# Altium PCB Power_SchematicWITHFOOTPRINTS.PcbDoc
Units mm, origin at the board's own origin, x right, y up, seen from the top; angles counter-clockwise.
Board outline 71.75 x 89.92 mm, 2 copper layers (Top Layer, Bottom Layer), stack 1.671 mm thick; 32 components, 19 nets, 90 pads, 9 vias.
Unrouted connection lines stored in the file: 6.
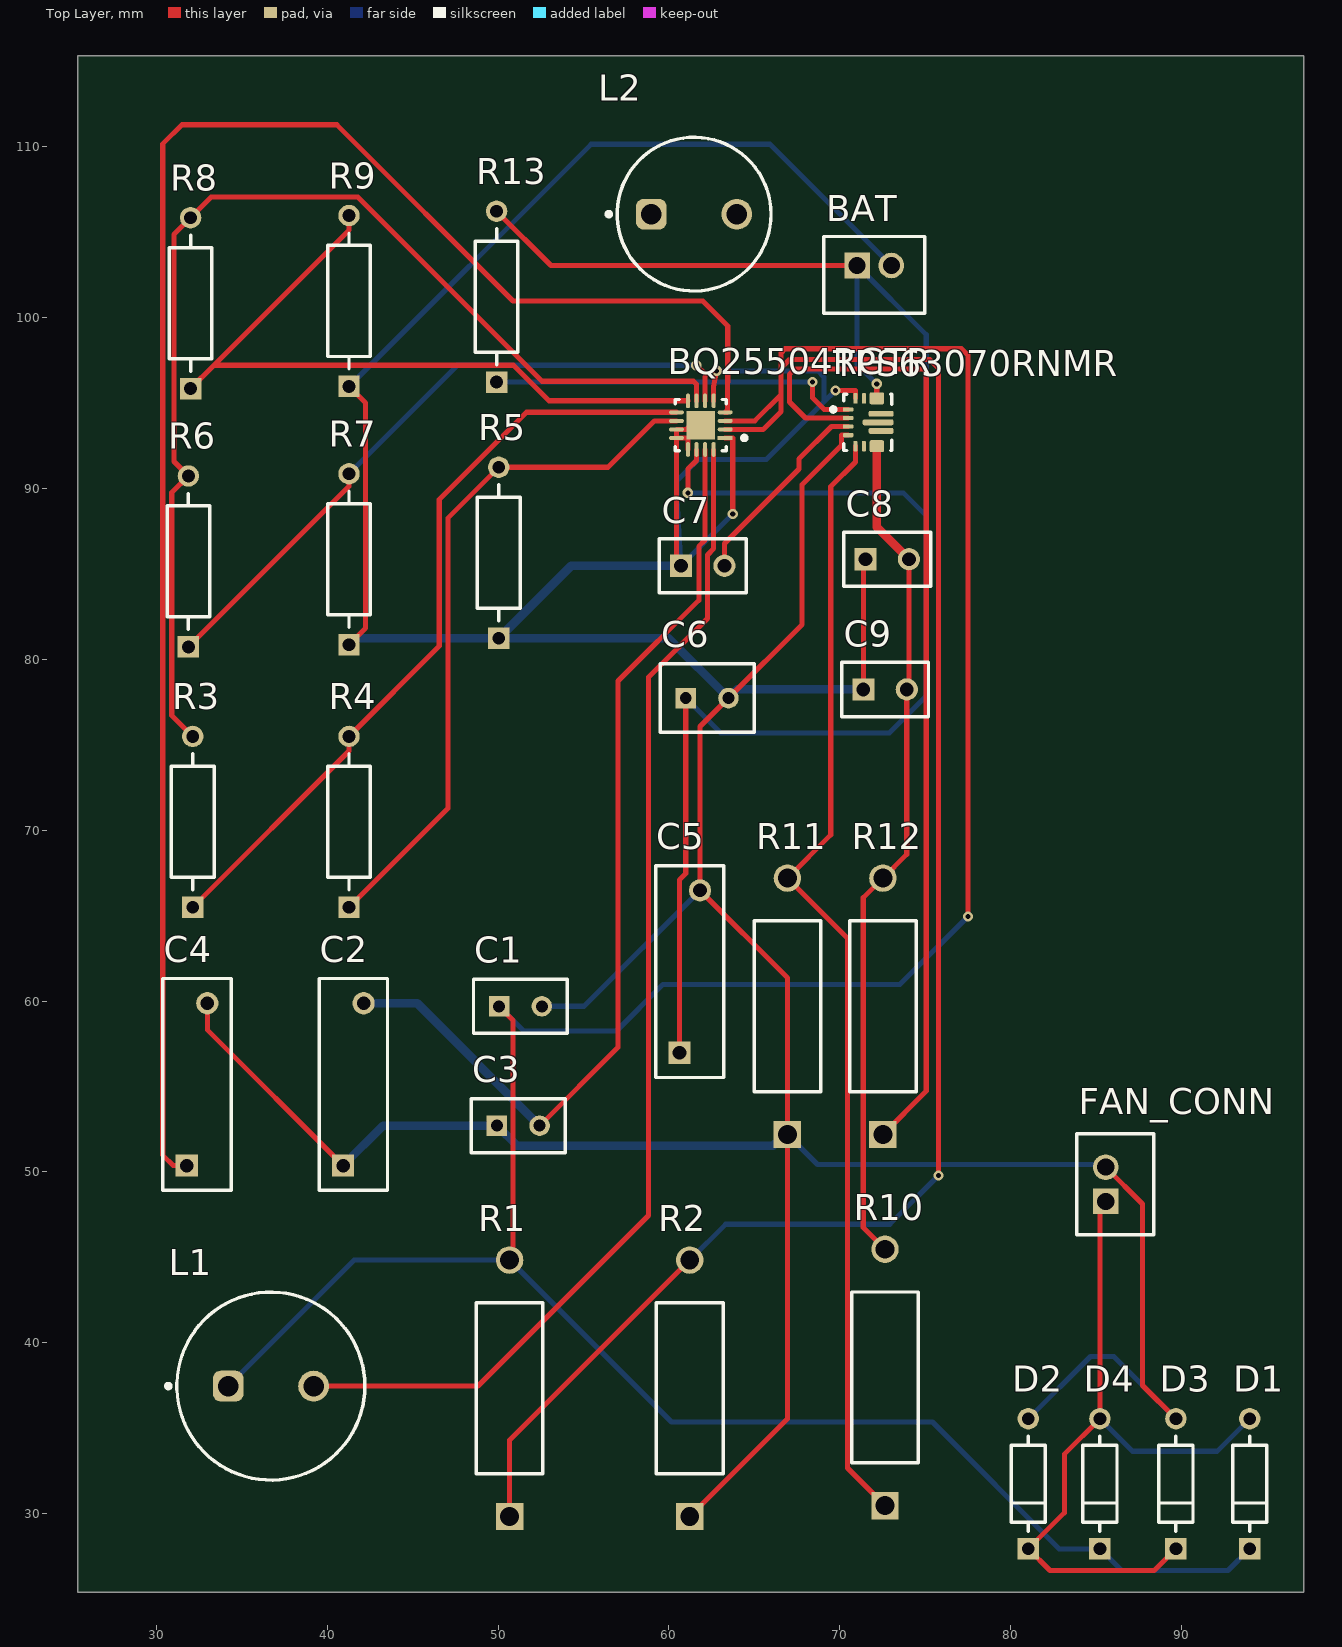
[diagram p0: Top Layer view]
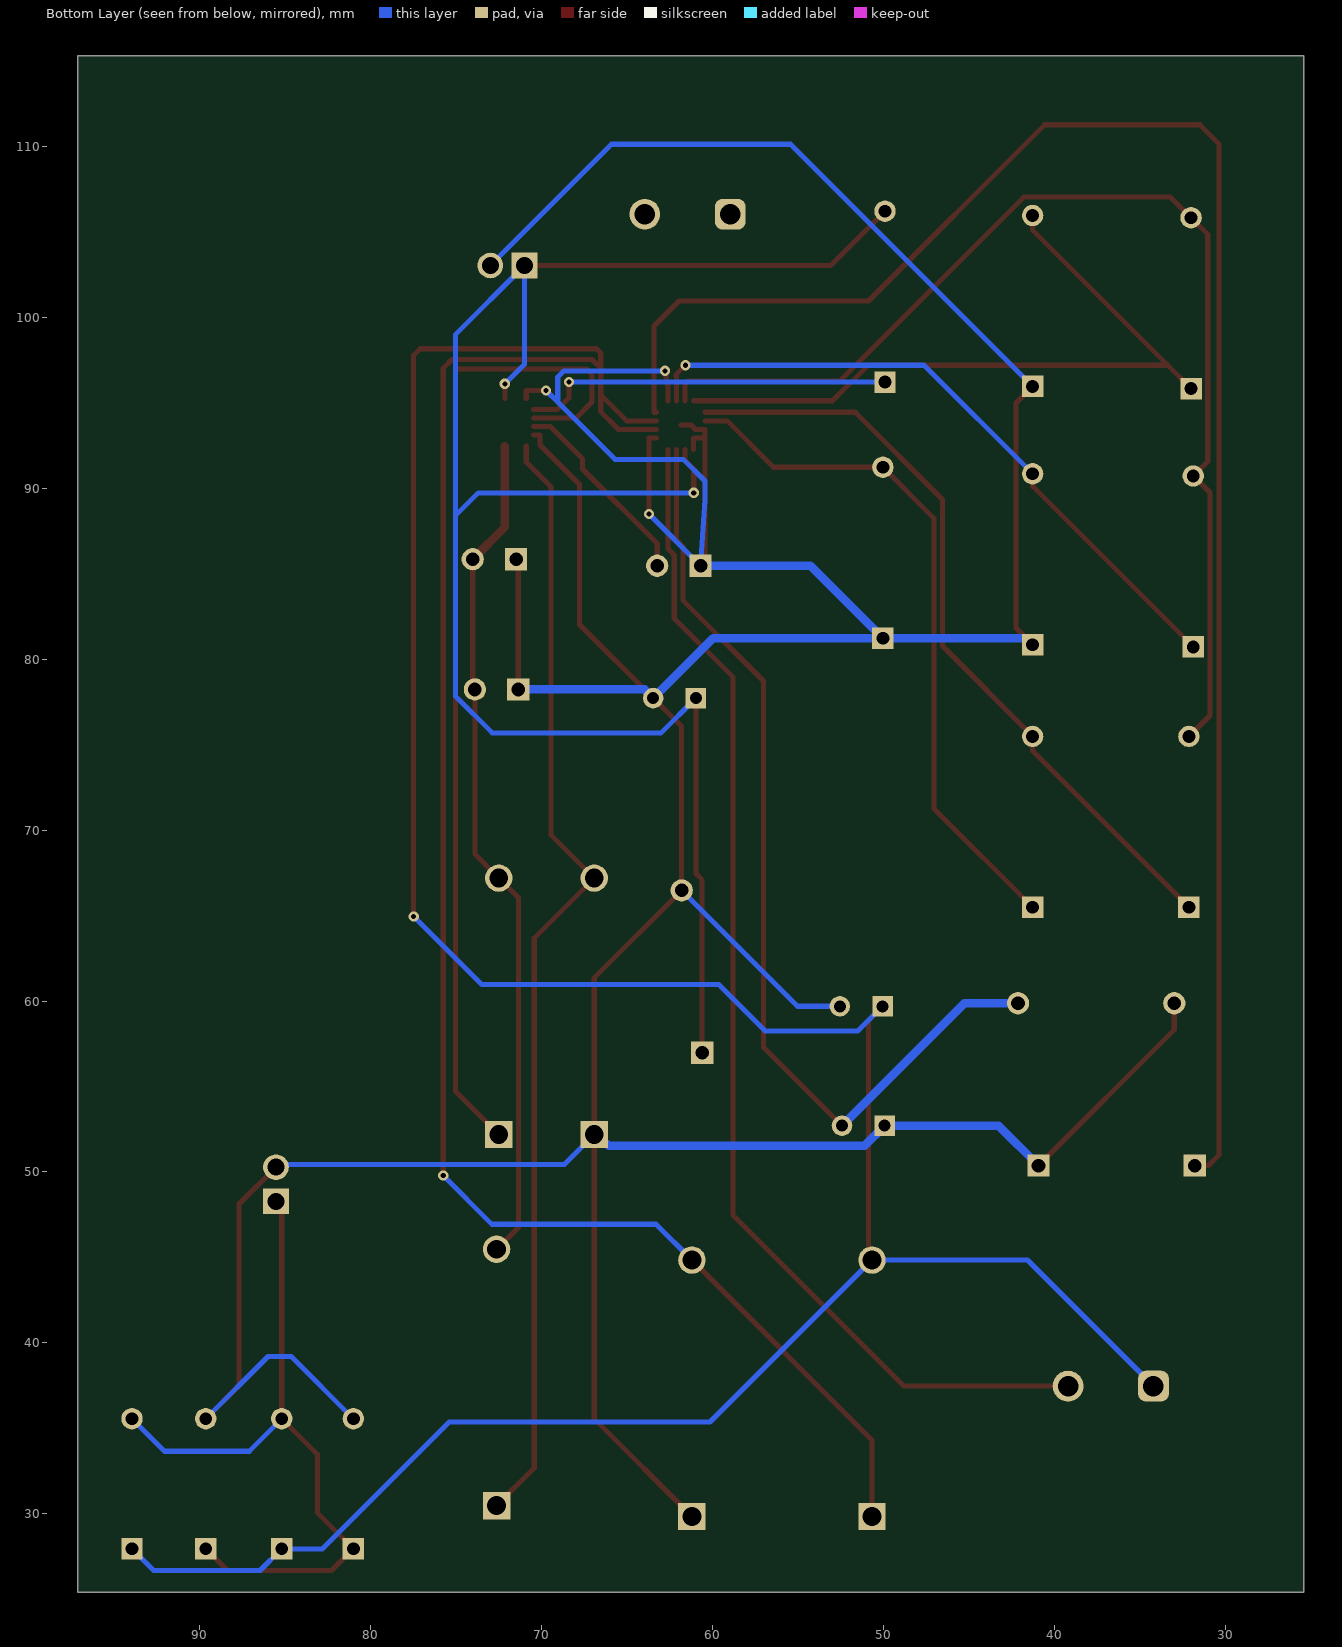
[diagram p1: Bottom Layer view, seen from below]
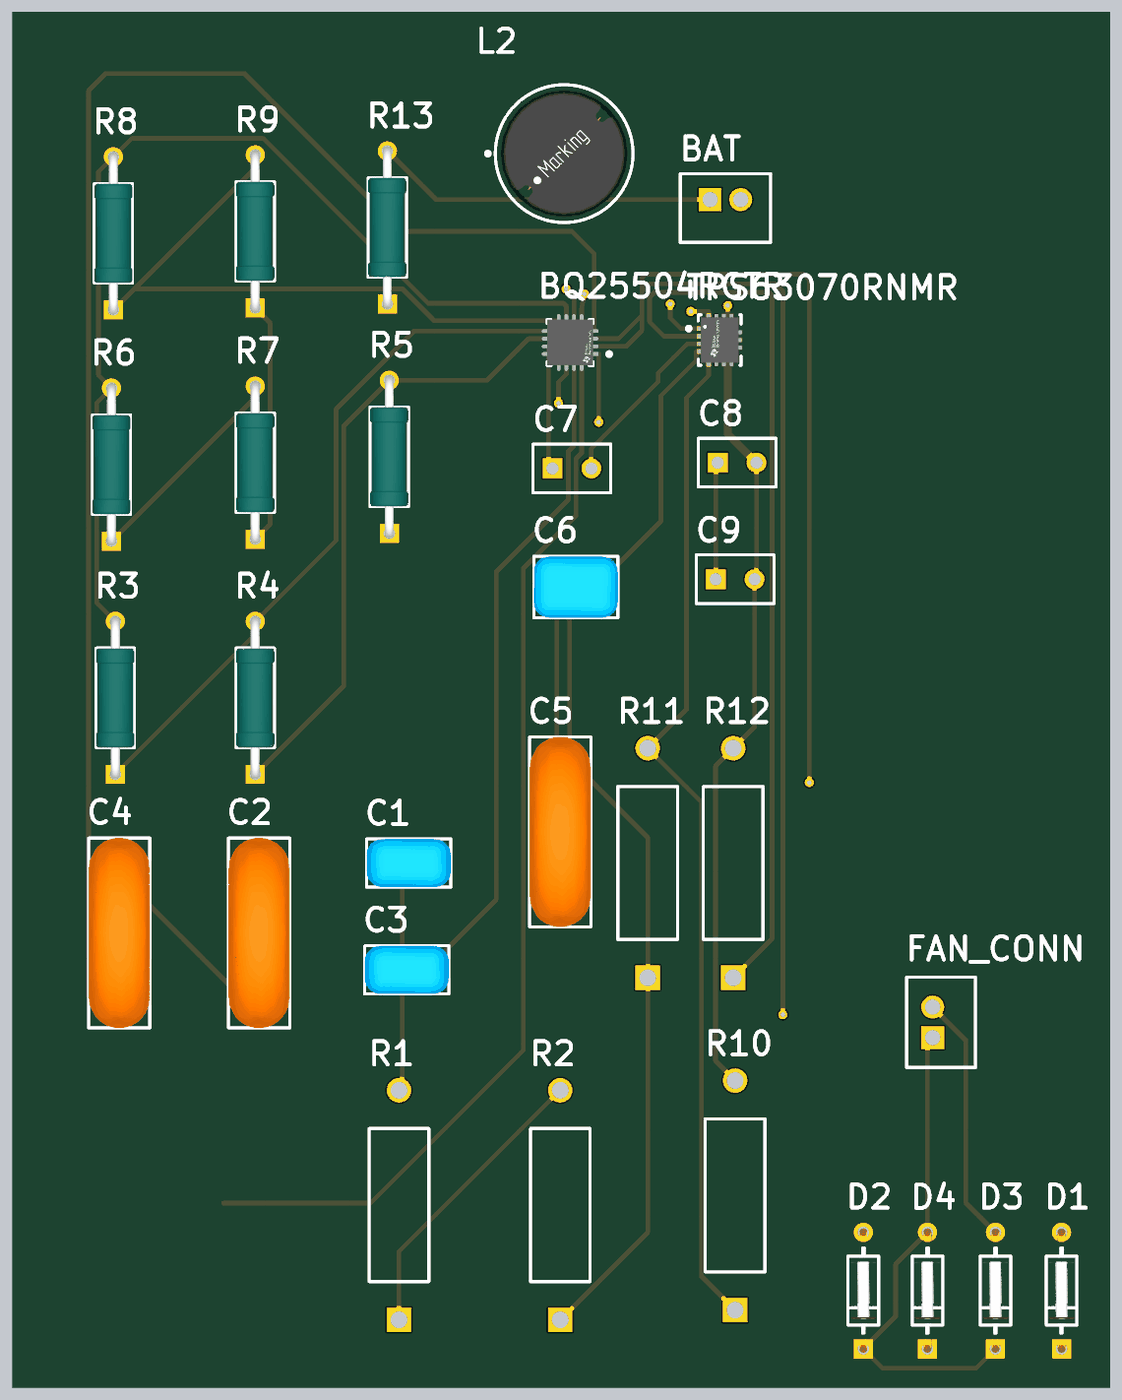
[diagram p2: 3D render of the assembled board from above, using the file's embedded part models]

## Layer stack, top to bottom
Top Solder: solder mask 0.0102, Solder Resist, Dk 3.5
Top Layer: signal copper 0.0356
Dielectric 1: dielectric 1.6, FR-4, Dk 4.8
Bottom Layer: signal copper 0.0356
Bottom Solder: solder mask 0.0102, Solder Resist, Dk 3.5

## Board outline
25.4,25.4 97.155,25.4 97.155,115.316 25.4,115.316

## Design rules (kind name [scope] priority, off if disabled: settings)
Clearance [All] p1: gap=0.2 ignorepadtopadclearanceinfootprint=FALSE
PolygonConnect [All] p1: connectstyle=Relief reliefconductorwidth=0.254 reliefentries=4 polygonreliefangle="90 Angle" airgapwidth=0.254
RoutingVias [All] p1: holewidth=0.3 width=0.6 viastyle="Through Hole" minholewidth=0.3 minwidth=0.6 maxholewidth=0.3 maxwidth=0.6
ShortCircuit ShortCircuit_1 [All] p1: allowed=FALSE
ShortCircuit [All] p2: allowed=FALSE
SilkToSolderMaskClearance [IsPad] p1: minsilkscreentomaskgap=0.1 clearancetoexposedcopper=TRUE
SolderMaskExpansion [All] p1: expansion=0.102 istentingtop=FALSE
UnRoutedNet [All] p1: checkbadconnections=TRUE
Width [All] p1: maxlimit=1 minlimit=0.3 preferedwidth=0.3
27 further rules are at their usual default settings.

## Components (designator, comment, footprint, x,y, rotation, side; value= is the part's Value field where it differs from the comment)
BAT "B2B-PH-K-S(LF)(SN)" JST-B2B-PH-K-S_V 72.009,102.489 r0 top
BQ25504RGTR "BQ25504RGTR" FP-RGT0016C-IPC_B 61.861,93.7 r180 top
C1 "RCER71E475K2DBH03A" FP-RCE2A2-MFG 51.308,59.69 r0 top
C2 "562R5GAS10" FP-562R5GAS10-MFG 41.529,55.118 r90 top
C3 "RCER71E475K2DBH03A" FP-RCE2A2-MFG 51.181,52.705 r0 top
C4 "562R5GAS10" FP-562R5GAS10-MFG 32.385,55.118 r90 top
C5 "562R5GAS10" FP-562R5GAS10-MFG 61.214,61.722 r90 top
C6 "RCER71E106K3DBH03A" FP-RCE3DB-MFG 62.23,77.724 r0 top
C7 "C320C104K5R5TA" CAPR51-254-508X318X736 61.976,85.471 r0 top
C8 "C320C104K5R5TA" CAPR51-254-508X318X736 72.771,85.852 r0 top
C9 "C320C104K5R5TA" CAPR51-254-508X318X736 72.644,78.232 r0 top
D1 "1N5711" FP-DO-35-MFG 93.98,31.75 r90 top value=2pF
D2 "1N5711" FP-DO-35-MFG 81.026,31.75 r90 top value=2pF
D3 "1N5711" FP-DO-35-MFG 89.662,31.75 r90 top value=2pF
D4 "1N5711" FP-DO-35-MFG 85.217,31.75 r90 top value=2pF
FAN_CONN "B2B-PH-K-S(LF)(SN)" JST-B2B-PH-K-S_V 86.106,49.276 r90 top
L1 "7447471033" WE-TIS_1111 1306.703,1307.465 r0 top
L2 "744741221" WE-TI_8055 61.468,106.045 r0 top
R1 "PR02000206202JA100" VISH-A1-2_V2 50.673,37.338 r90 top
R2 "PR02000206202JA100" VISH-A1-2_V2 61.214,37.338 r90 top
R3 "MRS25000C1000FRP00" FP-MRS25-MFG 32.131,70.485 r90 top
R4 "MRS25000C1000FRP00" FP-MRS25-MFG 41.275,70.485 r90 top
R5 "MRS25000C1000FRP00" FP-MRS25-MFG 50.038,86.233 r90 top
R6 "MRS25000C1000FRP00" FP-MRS25-MFG 31.877,85.725 r90 top
R7 "MRS25000C1000FRP00" FP-MRS25-MFG 41.275,85.852 r90 top
R8 "MRS25000C1000FRP00" FP-MRS25-MFG 32.004,100.838 r90 top
R9 "MRS25000C1000FRP00" FP-MRS25-MFG 41.275,100.965 r90 top
R10 "PR02000206202JA100" VISH-A1-2_V2 72.644,37.973 r90 top
R11 "PR02000206202JA100" VISH-A1-2_V2 66.929,59.69 r90 top
R12 "PR02000206202JA100" VISH-A1-2_V2 72.517,59.69 r90 top
R13 "MRS25000C1002FCT00" FP-MRS25-MFG 49.911,101.219 r90 top
TPS63070RNMR "TPS63070RNMR" FP-RNM0015A-MFG 71.635,93.865 r0 top

## Footprints (in the part's own frame and the unit in brackets; to place one, negate y for a bottom-side part, rotate by r counter-clockwise, add the part's x,y. Pads: shape width x height; smd on the part's side, far side on the other; paste and mask are expansions set on the pad)
CAPR51-254-508X318X736 [mm] "THD, 2-Leads, Body 5.08x3.18mm"
  rect 1.3x1.3 hole 0.8: 1(-1.27,0)
  round 1.3 hole 0.8: 2(1.27,0)
  silkscreen extent -2.54,-1.59 2.54,1.59, body extent -2.54,-1.59 2.54,1.59, height 7.36
FP-562R5GAS10-MFG [mm]
  rect 1.3x1.3 hole 0.8 paste-2539.97 mask+0: 1(-4.75,0.6)
  round 1.3 hole 0.8 paste-2539.97 mask+0: 2(4.75,-0.6)
  silkscreen extent -6.2,-2 6.2,2, body extent -6.3,-2.1 6.3,2.1, height 0.25
FP-DO-35-MFG [mm]
  rect 1.25x1.25 hole 0.75 paste-2539.97 mask+0: 1(-3.808,0)
  round 1.25 hole 0.75 paste-2539.97 mask+0: 2(3.808,0)
  silkscreen extent -2.78,-1 2.78,1, body extent -4.53,-1.1 4.53,1.1, height 0.25
FP-MRS25-MFG [mm]
  rect 1.25x1.25 hole 0.75 paste-2539.97 mask+0: 1(-5,0)
  round 1.25 hole 0.75 paste-2539.97 mask+0: 2(5,0)
  silkscreen extent -3.97,-1.25 3.97,1.25, body extent -5.72,-1.35 5.72,1.35, height 0.25
FP-RCE2A2-MFG [mm]
  rect 1.2x1.2 hole 0.7 paste-2539.97 mask+0: 1(-1.25,0)
  round 1.2 hole 0.7 paste-2539.97 mask+0: 2(1.25,0)
  silkscreen extent -2.75,-1.58 2.75,1.58, body extent -2.85,-1.68 2.85,1.68, height 0.25
FP-RCE3DB-MFG [mm]
  rect 1.2x1.2 hole 0.7 paste-2539.97 mask+0: 1(-1.25,0)
  round 1.2 hole 0.7 paste-2539.97 mask+0: 2(1.25,0)
  silkscreen extent -2.75,-2 2.75,2, body extent -2.85,-2.1 2.85,2.1, height 0.25
FP-RGT0016C-IPC_B [mm]
  rect 0.866x0.239 smd paste+0 mask+0: 1(-1.423,0.75)
  rrect100% 0.866x0.239 smd paste+0 mask+0: 2(-1.423,0.25) 3(-1.423,-0.25) 4(-1.423,-0.75) 9(1.423,-0.75) 10(1.423,-0.25) 11(1.423,0.25) 12(1.423,0.75)
  rrect100% 0.239x0.866 smd paste+0 mask+0: 5(-0.75,-1.423) 6(-0.25,-1.423) 7(0.25,-1.423) 8(0.75,-1.423) 13(0.75,1.423) 14(0.25,1.423) 15(-0.25,1.423) 16(-0.75,1.423)
  rect 1.68x1.68 smd paste-1000 mask+0: 17(0,0)
  silkscreen extent -2.68,-1.5 1.5,1.5, body extent -2.11,-2.11 2.11,2.11, height 0.25
FP-RNM0015A-MFG [mm]
  rrect40% 0.6x0.25 smd paste+0 mask-1000: 1(-1.15,0.75) 2(-1.15,0.25) 3(-1.15,-0.25) 4(-1.15,-0.75)
  rrect40% 0.25x0.6 smd paste+0 mask-1000: 5(-0.725,-1.4) 6(-0.225,-1.4) 14(-0.225,1.4) 15(-0.725,1.4)
  rrect29% 0.85x0.7 smd paste-1000 mask-1000: 7-8(0.525,-1.4) 12-13(0.525,1.4)
  rrect57% 1.45x0.35 smd paste-1000 mask-1000: 9(0.775,-0.5) 11(0.775,0.5)
  rrect57% 1.8x0.35 smd paste-1000 mask-1000: 10(0.6,0)
  silkscreen extent -2.15,-1.65 1.4,1.65, body extent -1.55,-1.85 1.6,1.85, height 0.25
JST-B2B-PH-K-S_V [mm] "Connector, 2-Leads, Body 5.9x4.5mm, Pitch 2mm"
  rect 1.5x1.5 hole 1: 1(-1,0.55)
  round 1.5 hole 1: 2(1,0.55)
  silkscreen extent -2.95,-2.25 2.95,2.25, body extent -2.95,-2.25 2.95,2.25, height 6
VISH-A1-2_V2 [mm] "Through Hole, 2-Leads, Dia 3.9mm, Body Length 10mm, Pin Spacing 15mm"
  rect 1.6x1.6 hole 1.1: 1(-7.5,0)
  round 1.6 hole 1.1: 2(7.5,0)
  silkscreen extent -5,-1.95 5,1.95, body extent -7.91,-1.95 7.92,1.95, height 3.88
WE-TI_8055 [mm] "Radial Leaded Wire Wound Inductor, body diameter 8.5mm"
  rrect50% 1.8x1.8 hole 1.2: 1(-2.5,0)
  round 1.8 hole 1.2: 2(2.5,0)
  silkscreen extent -5.11,-4.5 4.5,4.5, body extent -5.87,-5.87 5.87,5.87, height 5.55
WE-TIS_1111 [mm] "THT Shielded Radial Leaded Wire Wound Inductor, body diameter 11mm"
  rrect50% 1.8x1.8 hole 1.2: 1(-1272.5,-1270)
  round 1.8 hole 1.2: 2(-1267.5,-1270)
  silkscreen extent -1276.12,-1275.5 -1264.5,-1264.5, body extent -1275.3,-1275.3 -1264.7,-1264.7, height 10.6

## Part data
BAT FAN_CONN: library part CMP-2000-05162-1, "Male Header, Pitch 2 mm, 1 x 2 Position, Height 6 mm, Tail Length 3.4 mm, -25 to 85 degC, RoHS, Bulk", Manufacturer=JST, Datasheet URL=http://datasheet.octopart.com/B2B-PH-K-S%28LF%29%28SN%29-JST-datasheet-8324864.pdf, Datasheet Version=Nov-08, Manufacturer URL=http://www.jst.com/home2.html, No of Positions=2, Pitch=2mm, Style/Orientation=StraightHeader/Plug, Termination=Crimp, Type=ShroudedHeader
BQ25504RGTR: library part CMP-0321-00248-3, "IC ENERGY HARV CTRLR BATT 16QFN", Case/Package=QFN, Max Operating Temperature=85°C, Max Supply Voltage=5.25V, Min Input Voltage=130mV, Min Operating Temperature=-40°C, Min Supply Voltage=2.5V, Operating Supply Current=330nA, Operating Supply Voltage=3V, Output Current=200mA, Package Quantity=3000, Switching Frequency=1MHz, Contact Plating=Gold, Height=0.9mm, Lead Free="Lead Free", Length=3mm, Number of Pins=16, Packaging="Tape and Reel", Radiation Hardening=No, REACH SVHC="No SVHC", RoHS Compliant=Yes, Series=BQ25504
C1 C3: library part CMP-06035-022497-1, "Cap Ceramic 4.7uF 25V X7R ±10% Radial 2.5mm +125°C Automotive Ammo Pack", Capacitance=4.7uF, Case/Package=Radial, Dielectric=X7R, Max Operating Temperature=125°C, Min Operating Temperature=-55°C, Package Quantity=2000, Ratings=AEC-Q200, Resistor Type=Ceramic, Tolerance=10%, Voltage Rating=25V, Height=4mm, Height - Seated (Max)=0.157inch, Lead Diameter=0.5mm, Lead Pitch=0.098inch, Lead/Base Style=Straight, Length=0.217inch, Mount="Through Hole", Packaging="Tape and Reel", Termination=Radial, Voltage Rating (DC)=25V, Width=0.124inch
C2 C4 C5: library part CMP-02417-000061-1, "CAP CER 10000PF 1KV Z5U RADIAL", Capacitance=10nF, Case/Package=Radial, Dielectric=Z5U, Max Operating Temperature=105°C, Min Operating Temperature=-55°C, Package Quantity=250, Resistor Type=Ceramic, Tolerance=20%, Voltage=1kV, Application(s)="GENERAL PURPOSE", Construction=RADIAL, Contact Plating=Tin, Depth=4mm, Diameter=12.4mm, Dissipation Factor=2.5%, Height=0.25inch, Height - Seated (Max)=0.613inch, Lead Diameter=0.64mm, Lead Free="Lead Free", Lead Length=29mm, Lead Pitch=9.5mm, Lead/Base Style=Straight, Length=2inch, Mount="Through Hole", Packaging=Bulk, Radiation Hardening=No, RoHS Compliant=Yes, Series="Cera-Mite 562R", Termination=Radial, Voltage Rating=1kV, Voltage Rating (DC)=1kV, Weight=0.01lb, Width=4mm
C6: library part CMP-06035-005830-1, "Cap Ceramic 10uF 25V X7R ±10% Radial 2.5mm +125°C Automotive Ammo Pack", Capacitance=10uF, Case/Package=Radial, Dielectric=X7R, Max Operating Temperature=125°C, Min Operating Temperature=-55°C, Package Quantity=1500, Ratings=AEC-Q200, Resistor Type=Ceramic, Tolerance=10%, Voltage Rating=25V, Height=5mm, Height - Seated (Max)=0.197inch, Lead Diameter=0.5mm, Lead Pitch=0.098inch, Lead/Base Style=Straight, Length=0.217inch, Mount="Through Hole", Packaging="Tape and Reel", Termination=Radial, Voltage Rating (DC)=25V, Width=0.157inch
C7 C8 C9: library part CMP-1664-00004-1, "Radial Leaded Multilayer Ceramic Capacitor, 0.1 uF, +/- 10%, 50 V, -55 to 125 degC, 2-Pin THD, RoHS, Tape and Reel", Case\Package=SOT-23-5, Dropout Voltage="260 mV", Max Input Voltage="8 V", Max Operating Temperature="85 degC", Max Power Dissipation="250 mW", Min Operating Temperature="-40 degC", Output Current="150 mA", Output Voltage="5 V", Package Quantity=3000, ComponentLink1Description="Manufacturer URL", ComponentLink1URL=http://www.kemet.com/, ComponentLink2Description=Datasheet, ComponentLink2URL=http://www.kemet.com/docfinder?Partnumber=C320C104K5R5TA, DatasheetVersion=Dec-15, Height="1.3 mm", Length="3 mm", Mount="Surface Mount", Outputs=1, PackageDescription="2-Pin Through Hole Device, Body 5.08 x 3.18 mm, Pitch 2.54 mm", PackageReference=CAPR51-254-508X318X736, Packaging="Tape and Reel", Pins=5, Radiation Hardening=No, RoHSCompliant=true, Width="1.8 mm"
D1 D2 D3 D4: library part CMP-2000-05519-2, "RF DIODE SCHOTTKY 70V 430MW DO35", Capacitance=2pF, Forward Current=15mA, Manufacturer=STMicroelectronics, Max Junction Temp=+200°C, Max Repetitive Reverse Voltage=70V, Package=DO-35, Temperature="-65°C to +200°C", Temperature Range Low=-65°C, Automotive=No, Category=Diode, ComponentLink2Description=Datasheet, ComponentLink2URL=https://www.st.com/resource/en/datasheet/1n5711.pdf, Device Class L1="Discrete Semiconductors", Device Class L2=Diodes, Device Class L3="Schottky Diodes", Digikey Description="RF DIODE SCHOTTKY 70V 430MW DO35", Height=2mm, Ipc Land Pattern Name=DIOPA762W75L450D200, Lead Free=Yes, Manufacturer Part Number=1N5711, Mouser Description="Schottky Diodes & Rectifiers 15mA 70 Volt", Octopart=https://octopart.com/1n5711-stmicroelectronics-55399277, Reverse Voltage=70V, RoHS=TRUE, Temperature Range High=+200°C
L1: library part CMP-1406-00025-2, Ambient Temperature Range High=85°C, Ambient Temperature Range Low=-40°C, Case/Package=Radial, Current Rating=7.5A, DC Resistance (DCR)=9mΩ, Frequency=58MHz, Inductance=3.3µH, Inductance Tolerance=20%, Max Operating Temperature=125°C, Saturation Current=8A, Test Frequency=1kHz, Composition=Wirewound, Core Material=Ferrite, Diameter=11mm, Features=Shielded, Height=11.5mm, Lead Diameter=650µm, Lead Pitch=5mm, Length=11mm, Max DC Current=7.5A, Min Operating Temperature=-40°C, Mount="Radial, Through Hole", NexarPartId=22866550, Number of Pins=2, REACH SVHC=Unknown, RMS Current (Irms)=7.5A, RoHS=Compliant, Self Resonant Frequency=58MHz, Series Resistance=9mΩ, Shielding=Shielded, Termination=Radial, Tolerance=20%, Width=11mm
L2: library part CMP-0225-00032-3, Ambient Temperature Range High=85°C, Ambient Temperature Range Low=-40°C, Current Rating=660mA, DC Resistance (DCR)=970mΩ, Inductance=220µH, Inductance Tolerance=10%, Max Operating Temperature=125°C, Self Resonant Frequency=5MHz, Height=5.5mm, Length=8.5mm, Min Operating Temperature=-40°C, NexarPartId=22803387, Number of Pins=2, RoHS=Compliant, Width=8.5mm
R1 R2 R10 R11 R12: library part CMP-1240-00001-1, "Power Metal Film Leaded Resistor, 62 KOhm +/-5%, 2 W, 2-Pin THD, RoHS, Ammo Pack", Manufacturer="Vishay Semiconductor", Power="2 W", Resistance="62 KOhm", Temperature Coefficient="+/-250 ppm/degC", Tolerance=+/-5%, ComponentLink1Description="Manufacturer URL", ComponentLink1URL=http://www.vishay.com/, ComponentLink2Description=Datasheet, ComponentLink2URL=http://www.vishay.com/docs/28729/28729.pdf, ComponentLink3Description="Package Specification", ComponentLink3URL=http://www.vishay.com/docs/28729/28729.pdf, DatasheetVersion=Jun-13, Mounting Technology="Through Hole", PackageDescription="2-Pin Axial Lead, Body 10 x 3.9 mm", Packing="Ammo Pack", PartNumber=PR02000206202JA100, RoHS=TRUE
R3 R4 R5 R6 R7 R8 R9: library part CMP-00030-42757237-1, "MRS25000C1000FRP00 Resistor, 100 Ohm, ± 1%, 600 mW, Axial Leaded, Metal Film (Thin Film), Professional", Case/Package=Axial, Max Operating Temperature=155°C, Max Power Dissipation=600mW, Min Operating Temperature=-55°C, Resistance=100Ω, Temperature Coefficient=50ppm/°C, Tolerance=1%, Voltage Rating=350V, Composition="Metal Film, Thin Film", Contact Plating=Tin, Diameter=2.5mm, Lead Diameter=600µm, Lead Free="Lead Free", Length=6.5mm, Military Standard=Not, Mount="Through Hole", NexarPartId=42757237, Number of Pins=2, Number of Terminations=2, Packaging="Tape & Reel (TR)", Power Rating=600mW, Radiation Hardening=No, REACH SVHC=Unknown, RoHS=Compliant, Schedule B="8533210090, 8533210090", Termination=Axial, Voltage Rating (DC)=350V, Width=2.5mm
R13: library part CMP-00030-42632392-1, "MRS25000C1002FCT00 Resistor, 10 kOhm, ± 1%, 600 mW, Axial Leaded, Metal Film (Thin Film), Professional", Case/Package=Conformal, Max Operating Temperature=155°C, Max Power Dissipation=600mW, Min Operating Temperature=-55°C, Resistance=10kΩ, Temperature Coefficient=50ppm/°C, Tolerance=1%, Voltage Rating=350V, Composition="Metal Film, Thin Film", Contact Plating=Tin, Diameter=2.5mm, Lead Free="Lead Free", Lead Length=26mm, Length=6.5mm, Military Standard=Not, Mount="Through Hole", NexarPartId=42632392, Number of Pins=2, Number of Terminations=2, Power Rating=600mW, Radiation Hardening=No, REACH SVHC=Unknown, RoHS=Compliant, Schedule B="8533210090, 8533210090", Termination=Axial, Voltage Rating (DC)=350V, Width=2.5mm
TPS63070RNMR: library part CMP-04918-000409-1, "IC REG BCK BST ADJ 3.6A 15VQFN", Case/Package=VQFN, Max Input Voltage=16V, Max Operating Temperature=125°C, Max Output Voltage=9V, Min Input Voltage=2V, Min Operating Temperature=-40°C, Min Output Voltage=2.5V, Output Current=2A, Quiescent Current=50uA, Switching Frequency=2.4MHz, Lead Free="Lead Free", Mount="Surface Mount", Number of Outputs=1, Number of Pins=15, Output Configuration=Positive, Output Type=Adjustable, Packaging="Tape and Reel", RoHS Compliant=Yes, Synchronous Rectifier=Yes, Topology=Buck-Boost

## Via types
v1: diameter 0.6, hole 0.3, Top Layer to Bottom Layer, 9 vias

## Nets (pads, with @x,y where several pads share a name; then routed paths per layer and width w, separated by ;. In a path a pad name is that pad's centre, name@x,y a point inside that pad or via, vN(x,y) a via of type N, cw(c..) or ccw(c..) an arc to the next point about the centre after c; other vN are vias at no path point)
ESP: C8.2 C9.2 R10.2 R12.2 TPS63070RNMR.7-8 | length 49.4
  Top Layer w0.3: R10.2 71.367,46.75 71.367,66.04 R12.2 73.914,68.587 C9.2 74.041,78.359 C8.2
  Top Layer w0.5: TPS63070RNMR.7-8 72.16,87.733 C8.2
FAN_VIN: D1.2 D2.1 D3.1 D4.2 FAN_CONN.1 | length 42.2
  Top Layer w0.3: FAN_CONN.1 85.217,47.937 D4.2 83.134,33.475 83.134,30.05 D2.1 82.298,26.67 88.39,26.67 D3.1
  Bottom Layer w0.3: D4.2 87.12,33.655 92.077,33.655 D1.2
GND: BAT.2 BQ25504RGTR.1 BQ25504RGTR.5 BQ25504RGTR.11 BQ25504RGTR.12 BQ25504RGTR.13 BQ25504RGTR.17 C1.2 C2.1 C3.1 C4.2 C5.2 C6.2 C7.1 C8.1 C9.1 D2.2 D3.2 FAN_CONN.2 R2.1 R5.1 R7.1 R9.1 R11.1 TPS63070RNMR.4 TPS63070RNMR.6 TPS63070RNMR.10 TPS63070RNMR.15 | length 328
  Top Layer w0.3: C4.2 32.985,58.312 C2.1 ; R7.1 42.25,81.827 42.25,94.99 R9.1 ; C7.1 60.438,85.739 BQ25504RGTR.12 ; BQ25504RGTR.13 61.111,92.95 BQ25504RGTR.12 ; R2.1 66.929,35.553 R11.1 66.929,61.357 C5.2 61.814,76.058 C6.2 67.793,82.037 67.793,90.221 70.104,92.532 70.104,93.115 TPS63070RNMR.4 ; BQ25504RGTR.17 61.261,93.7 61.011,93.45 BQ25504RGTR.11 BQ25504RGTR.12 ; BQ25504RGTR.5 62.611,95.936 v1(62.789,96.876) ; BQ25504RGTR.1 63.729,92.95 v1(63.729,88.494) ; v1(69.748,95.733) 70.91,95.733 TPS63070RNMR.15 ; C9.1 71.374,85.725 C8.1 ; FAN_CONN.2 87.713,48.119 87.713,37.507 D3.2
  Bottom Layer w0.3: R9.1 55.444,110.134 65.914,110.134 BAT.2 ; C1.2 55.032,59.69 C5.2 ; v1(62.789,96.876) 68.707,96.876 69.063,96.52 69.063,95.047 ; v1(63.729,88.494) C7.1 60.453,89.341 60.453,90.424 61.725,91.696 65.712,91.696 69.063,95.047 ; R11.1 68.685,50.434 85.398,50.434 FAN_CONN.2 ; v1(69.748,95.733) 69.063,95.047 ; D2.2 84.66,39.192 86.028,39.192 D3.2
  Bottom Layer w0.5: C2.1 43.266,52.705 C3.1 51.099,51.537 66.086,51.537 66.19,51.64 66.379,51.64 R11.1 ; R7.1 41.65,81.227 41.937,81.227 41.943,81.233 R5.1 ; C7.1 54.276,85.471 R5.1 ; C9.1 63.988,78.232 C6.2 59.971,81.233 R5.1
NetBQ25504RGTR_2: BQ25504RGTR.2 C1.1 D1.1 D4.1 L1.1 R1.2 | length 168.2
  Top Layer w0.3: C1.1 50.881,58.867 50.881,45.046 R1.2 ; BQ25504RGTR.2 65.51,93.45 66.548,94.488 66.548,97.917 66.802,98.171 77.114,98.171 77.495,97.79 v1(77.495,64.948)
  Bottom Layer w0.3: L1.1 41.576,44.838 R1.2 60.154,35.357 75.413,35.357 82.827,27.942 D4.1 86.489,26.67 92.708,26.67 D1.1 ; C1.1 51.506,58.242 56.921,58.242 59.639,60.96 73.508,60.96 v1(77.495,64.948)
NetBQ25504RGTR_3: BQ25504RGTR.3 R1.1 R2.2 | length 98.3
  Top Layer w0.3: R1.1 50.673,34.297 R2.2 ; BQ25504RGTR.3 65.024,93.95 66.548,95.474 66.548,97.028 67.056,97.536 75.26,97.536 75.768,97.028 v1(75.768,49.784)
  Bottom Layer w0.3: R2.2 63.315,46.939 72.923,46.939 v1(75.768,49.784)
NetBQ25504RGTR_4: BQ25504RGTR.4 C4.1 | length 104.4
  Top Layer w0.3: C4.1 30.988,50.368 30.378,50.978 30.378,110.16 31.496,111.277 40.564,111.277 50.876,100.965 61.976,100.965 63.439,99.502 63.439,96.236 63.428,96.226 63.428,94.45 BQ25504RGTR.4
NetBQ25504RGTR_6: BQ25504RGTR.6 R6.1 R7.2 | length 39.3
  Top Layer w0.3: R6.1 41.275,90.123 R7.2 ; v1(61.595,97.206) 62.128,96.672 62.128,96.569 62.111,96.552 BQ25504RGTR.6
  Bottom Layer w0.3: R7.2 47.629,97.206 v1(61.595,97.206)
NetBQ25504RGTR_7: BQ25504RGTR.7 BQ25504RGTR.16 L1.2 R3.2 R6.2 R8.2 | length 137.8
  Top Layer w0.3: R3.2 30.902,76.714 30.902,89.75 R6.2 31.029,91.573 31.029,104.863 R8.2 33.206,107.04 41.797,107.04 52.571,96.266 61.435,96.266 61.611,96.09 BQ25504RGTR.7 ; L1.2 48.819,37.465 58.801,47.447 58.801,78.943 62.246,82.388 62.246,86.106 62.611,86.471 BQ25504RGTR.16
NetBQ25504RGTR_8: BQ25504RGTR.8 R8.1 R9.2 | length 42.6
  Top Layer w0.3: R8.1 33.372,97.206 ; R9.2 41.275,105.109 33.372,97.206 ; BQ25504RGTR.8 52.984,95.123 50.902,97.206 33.372,97.206
NetBQ25504RGTR_9: BQ25504RGTR.9 R3.1 R4.2 | length 45.8
  Top Layer w0.3: R3.1 41.275,74.629 R4.2 46.558,80.768 46.558,89.349 51.658,94.45 BQ25504RGTR.9
NetBQ25504RGTR_10: BQ25504RGTR.10 R4.1 R5.2 | length 40.9
  Top Layer w0.3: R4.1 47.058,71.268 47.058,88.253 R5.2 56.435,91.233 59.152,93.95 BQ25504RGTR.10
NetBQ25504RGTR_15: BQ25504RGTR.15 C2.2 C3.2 | length 56.9
  Top Layer w0.3: C3.2 57.023,57.297 57.023,78.732 61.746,83.455 61.746,86.606 62.111,86.971 BQ25504RGTR.15
  Bottom Layer w0.5: C2.2 45.268,59.868 C3.2
NetC7_2: C7.2 TPS63070RNMR.3 | length 11.7
  Top Layer w0.3: C7.2 63.246,86.767 67.615,91.136 67.615,91.726 69.504,93.615 TPS63070RNMR.3
NetL2_1: L2.1 TPS63070RNMR.11
NetL2_2: L2.2 TPS63070RNMR.9
NetR10_1: R10.1 R11.2 TPS63070RNMR.5 | length 66
  Top Layer w0.3: TPS63070RNMR.5 70.91,91.542 69.469,90.101 69.469,69.73 R11.2 70.444,63.675 70.444,32.673 R10.1
NetR12_1: R12.1 TPS63070RNMR.2 | length 59.3
  Top Layer w0.3: TPS63070RNMR.2 67.988,94.115 67.056,95.047 67.056,96.672 67.361,96.977 74.879,96.977 75.057,96.799 75.057,54.73 R12.1
NetR13_1: R13.1 TPS63070RNMR.1 TPS63070RNMR.14 | length 21.8
  Top Layer w0.3: v1(68.402,96.219) 68.402,95.301 69.088,94.615 TPS63070RNMR.1
  Bottom Layer w0.3: R13.1 v1(68.402,96.219)
VBAT: BAT.1 BQ25504RGTR.14 C5.1 C6.1 R13.2 TPS63070RNMR.12-13 | length 111.5
  Top Layer w0.3: R13.2 53.091,103.039 BAT.1 ; C5.1 60.614,67.09 60.98,67.456 C6.1 ; v1(61.103,89.738) 61.103,91.127 61.611,91.635 BQ25504RGTR.14 ; TPS63070RNMR.12-13 v1(72.16,96.114)
  Bottom Layer w0.3: C6.1 63.012,75.692 72.898,75.692 75.057,77.851 75.057,88.392 ; v1(61.103,89.738) 73.711,89.738 75.057,88.392 ; v1(72.16,96.114) 71.009,97.265 BAT.1 75.057,98.991 75.057,88.392